# EAGLE board CT_schematic (EAGLE 7.6.0)

Size 100 x 80 mm. Coordinates in mm from the lower left corner, seen from the top.
Outline: 0,0 100,0 100,80 0,80 0,0
Copper layers (1*16): Top 0.035mm / dielectric 1.5mm / Bottom 0.035mm
Design rules "default": minimum track width 10mil, minimum drill 24mil, track to track 8mil, track to pad 8mil, pad to pad 8mil, via to via 8mil, smd to smd 8mil, copper to edge 40mil, drill to drill 8mil, minimum pad ring 10mil, minimum via ring 8mil, stop-mask expansion 4mil, vias tented up to drill 0mil, thermal gap 10mil

## Footprints (pad centres in the part's own frame; a part is rotated, then mirrored left to right if it is on the bottom)
C0603 = smd 0.8 x 0.8: 1 -0.762,0; 2 0.762,0
C0402 = smd 0.5 x 0.5: 1 -0.508,0; 2 0.508,0
C1210 = smd 1.2 x 2.5: 1 -1.524,0; 2 1.524,0
C0805 = smd 1.2 x 1.3: 1 -1.016,0; 2 1.016,0
2220 = smd 1.85 x 5.5: 1 -2.55,0; 2 2.55,0
EXV-9H = smd 3.505 x 1.676: 1 -2.857,0; 2 2.857,0
L0603 = smd 0.8 x 0.8: 1 -0.762,0; 2 0.762,0
DR1040 = smd 1.6 x 3.2: 1 -4.458,0; 2 4.458,0
PJ-037B_PACKAGE = drill 3.7 square: 1 12,0 | drill 3.2 square: 2 6,0
R0603 = smd 0.8 x 0.8: 1 -0.762,0; 2 0.762,0
UFQFPN48 = smd 0.559 x 0.305: 1 -3.375,2.751; 2 -3.375,2.251; 3 -3.375,1.75; 4 -3.375,1.25; 5 -3.375,0.75; 6 -3.375,0.25; 7 -3.375,-0.25; 8 -3.375,-0.75; 9 -3.375,-1.25; 10 -3.375,-1.75; 11 -3.375,-2.251; 12 -3.375,-2.751; 25 3.375,-2.751; 26 3.375,-2.251; 27 3.375,-1.75; 28 3.375,-1.25; 29 3.375,-0.75; 30 3.375,-0.25; 31 3.375,0.25; 32 3.375,0.75; 33 3.375,1.25; 34 3.375,1.75; 35 3.375,2.251; 36 3.375,2.751 | smd 0.305 x 0.559: 13 -2.751,-3.375; 14 -2.251,-3.375; 15 -1.75,-3.375; 16 -1.25,-3.375; 17 -0.75,-3.375; 18 -0.25,-3.375; 19 0.25,-3.375; 20 0.75,-3.375; 21 1.25,-3.375; 22 1.75,-3.375; 23 2.251,-3.375; 24 2.751,-3.375; 37 2.751,3.375; 38 2.251,3.375; 39 1.75,3.375; 40 1.25,3.375; 41 0.75,3.375; 42 0.25,3.375; 43 -0.25,3.375; 44 -0.75,3.375; 45 -1.25,3.375; 46 -1.75,3.375; 47 -2.251,3.375; 48 -2.751,3.375 | smd 5.588 x 5.588: 49 0,0
LGA63S127P16X13_2050X1750X150 = smd 0.9 x 0.9: 1 -9.525,-8.05; 2 -8.255,-8.05; 3 -6.985,-8.05; 4 -5.715,-8.05; 5 -4.445,-8.05; 6 -3.175,-8.05; 7 -1.905,-8.05; 8 -0.635,-8.05; 9 0.635,-8.05; 10 1.905,-8.05; 11 3.175,-8.05; 12 4.445,-8.05; 13 5.715,-8.05; 14 6.985,-8.05; 15 8.255,-8.05; 16 9.525,-8.05; 17 9.525,-6.35; 18 9.525,-5.08; 19 9.525,-3.81; 20 9.525,-2.54; 21 9.525,-1.27; 22 9.525,0; 23 9.525,1.27; 24 9.525,2.54; 25 9.525,3.81; 26 9.525,5.08; 27 9.525,6.35; 28 9.525,8.05; 29 8.255,8.05; 30 6.985,8.05; 31 5.715,8.05; 32 4.445,8.05; 33 3.175,8.05; 34 1.905,8.05; 35 0.635,8.05; 36 -0.635,8.05; 37 -1.905,8.05; 38 -3.175,8.05; 39 -4.445,8.05; 40 -5.715,8.05; 41 -6.985,8.05; 42 -8.255,8.05; 43 -9.525,8.05; 44 -9.525,6.35; 45 -9.525,5.08; 46 -9.525,3.81; 47 -9.525,2.54; 48 -9.525,1.27; 49 -9.525,0; 50 -9.525,-1.27; 51 -9.525,-2.54; 52 -9.525,-3.81; 53 -9.525,-5.08; 54 -9.525,-6.35 | smd 2.2 x 2.2: 55 -4.5,-4.5; 56 -1.5,-4.5; 57 1.5,-4.5; 58 -4.5,-1.5; 59 -1.5,-1.5; 60 1.5,-1.5; 61 -4.5,1.5; 62 -1.5,1.5; 63 1.5,1.5
COAXIAL_C = smd 1 x 1: 1 0,-1.5; 2 0,1.5 | smd 1.05 x 2.2: 3 -1.475,0; 4 1.475,0
SSOP-28 = smd 1.5 x 0.4: 1 -3.625,4.225; 2 -3.625,3.575; 3 -3.625,2.925; 4 -3.625,2.275; 5 -3.625,1.625; 6 -3.625,0.975; 7 -3.625,0.325; 8 -3.625,-0.325; 9 -3.625,-0.975; 10 -3.625,-1.625; 11 -3.625,-2.275; 12 -3.625,-2.925; 13 -3.625,-3.575; 14 -3.625,-4.225; 15 3.625,-4.225; 16 3.625,-3.575; 17 3.625,-2.925; 18 3.625,-2.275; 19 3.625,-1.625; 20 3.625,-0.975; 21 3.625,-0.325; 22 3.625,0.325; 23 3.625,0.975; 24 3.625,1.625; 25 3.625,2.275; 26 3.625,2.925; 27 3.625,3.575; 28 3.625,4.225
FCI_10118193-0001LF = smd 0.4 x 1.35: 1 -1.3,2.675; 2 -0.65,2.675; 3 0,2.675; 4 0.65,2.675; 5 1.3,2.675 | smd 1.6 x 1.4: 6 -3.2,2.45; 7 3.2,2.45 | smd 1.9 x 1.9: 8 -1.2,0; 9 1.2,0 | hole 0.5: -3.3,0; 3.3,0
ABS07-32.768KHZ-7-T = smd 1.1 x 2.4: 1 -2.5,0; 2 0,0
ABLS-25.000MHZ-B2F-T = smd 5.6 x 2.8: 1 -3.81,0; 2 5.69,0
ASFL1 = smd 1.7 x 1.5: 1 -1.27,-1.1; 2 1.27,-1.1; 3 1.27,1.1; 4 -1.27,1.1
QFN-16_EP = smd 0.805 x 0.3: 1 -1.452,0.75; 2 -1.452,0.25; 3 -1.452,-0.25; 4 -1.452,-0.75; 9 1.452,-0.75; 10 1.452,-0.25; 11 1.452,0.25; 12 1.452,0.75 | smd 0.3 x 0.805: 5 -0.75,-1.452; 6 -0.25,-1.452; 7 0.25,-1.452; 8 0.75,-1.452; 13 0.75,1.452; 14 0.25,1.452; 15 -0.25,1.452; 16 -0.75,1.452 | smd 1.55 x 1.55: 17 0,0
SON-6 = smd 0.55 x 0.3: 1 -0.355,0.5 | smd 0.52 x 0.3: 2 -0.37,0; 3 -0.37,-0.5; 4 0.37,-0.5; 5 0.37,0; 6 0.37,0.5
SW_4-1437565-2 = smd 1.4 x 2.1: 1 -2.23,4.55; 2 -2.23,-4.55; 3 2.23,4.55; 4 2.23,-4.55
LGM67K-G1J2-24-Z = smd 0.8 x 1.4: A -2,0; C 0,0
NC7SZ125M5X = smd 1.3 x 0.7: 1 -1.3,0.95; 2 -1.3,0; 3 -1.3,-0.95; 4 1.3,-0.95; 5 1.3,0.95
DUMMY_PACKAGE_144 = drill 0.3: 1 0,-1; 2 1.5,-1; 3 3,-1

## Placement (x,y rotation side)
C1  1e-07  [C0603]  -63.5,62.23 0 top  (outside the outline)
C2  1e-07  [C0603]  -67.31,62.23 0 top  (outside the outline)
C3  1e-07  [C0603]  -15.24,67.31 0 top  (outside the outline)
C4  1e-07  [C0603]  -19.05,67.31 0 top  (outside the outline)
C5  4.7e-06  [C0603]  -59.69,62.23 0 top  (outside the outline)
C6  1e-07  [C0603]  -22.86,67.31 0 top  (outside the outline)
C7  1e-08  [C0603]  -26.67,67.31 0 top  (outside the outline)
C8  1e-06  [C0603]  -30.48,67.31 0 top  (outside the outline)
C9  1e-11  [C0402]  -30.48,72.39 0 top  (outside the outline)
C10  1e-11  [C0402]  -34.29,72.39 0 top  (outside the outline)
C11  1e-11  [C0402]  -38.1,72.39 0 top  (outside the outline)
C12  1e-11  [C0402]  -41.91,72.39 0 top  (outside the outline)
C13  1e-12  [C0402]  -45.72,72.39 0 top  (outside the outline)
C14  2.2e-05  [C1210]  -29.21,55.88 0 top  (outside the outline)
C15  1e-07  [C0402]  -49.53,72.39 0 top  (outside the outline)
C16  1e-07  [C0402]  -53.34,72.39 0 top  (outside the outline)
C17  1e-07  [C0402]  -57.15,72.39 0 top  (outside the outline)
C18  4.7e-06  [C0805]  -46.99,54.61 0 top  (outside the outline)
C19  1e-07  [C0402]  -60.96,72.39 0 top  (outside the outline)
C20  1e-07  [C0402]  -64.77,72.39 0 top  (outside the outline)
C21  1e-08  [C0402]  -68.58,72.39 0 top  (outside the outline)
C22  1e-05  [C0805]  -52.07,54.61 0 top  (outside the outline)
C23  1e-06  [C0603]  -34.29,67.31 0 top  (outside the outline)
C24  1e-07  [C0402]  -15.24,77.47 0 top  (outside the outline)
C25  6.8e-05  [2220]  -48.26,27.94 0 top  (outside the outline)
C26  1e-07  [C0402]  -19.05,77.47 0 top  (outside the outline)
C27  0.0001  [EXV-9H]  -57.15,39.37 0 top  (outside the outline)
C28  0.0001  [EXV-9H]  -17.78,48.26 0 top  (outside the outline)
C29  1e-08  [C0402]  -22.86,77.47 0 top  (outside the outline)
C30  1e-08  [C0402]  -26.67,77.47 0 top  (outside the outline)
F1  240.0  [L0603]  -38.1,67.31 0 top  (outside the outline)
I1  3.6e-09  [C0402]  -26.67,72.39 0 top  (outside the outline)
I2  5.2e-06  [DR1040]  -38.1,27.94 0 top  (outside the outline)
J1  PJ-037B  [PJ-037B_PACKAGE]  -66.04,7.62 0 top  (outside the outline)
R1  10000.0  [R0603]  -20.32,62.23 0 top  (outside the outline)
R2  1000.0  [R0603]  -41.91,67.31 0 top  (outside the outline)
R3  1600.5  [R0603]  -45.72,67.31 0 top  (outside the outline)
R4  4700.0  [R0603]  -49.53,67.31 0 top  (outside the outline)
R5  4700.0  [R0603]  -53.34,67.31 0 top  (outside the outline)
R6  2200.0  [R0603]  -57.15,67.31 0 top  (outside the outline)
R7  2200.0  [R0603]  -60.96,67.31 0 top  (outside the outline)
R8  10000.0  [R0603]  -25.4,62.23 0 top  (outside the outline)
R9  100000.0  [R0603]  -57.15,54.61 0 top  (outside the outline)
R10  2700.0  [R0603]  -64.77,67.31 0 top  (outside the outline)
R11  4700.0  [R0603]  -68.58,67.31 0 top  (outside the outline)
R12  10000.0  [R0603]  -30.48,62.23 0 top  (outside the outline)
R13  10000.0  [R0603]  -35.56,62.23 0 top  (outside the outline)
R14  20000.0  [R0603]  -40.64,62.23 0 top  (outside the outline)
R15  91000.0  [R0603]  -45.72,62.23 0 top  (outside the outline)
R16  300000.0  [R0603]  -62.23,54.61 0 top  (outside the outline)
R17  10000.0  [R0603]  -50.8,62.23 0 top  (outside the outline)
R18  10000.0  [R0603]  -55.88,62.23 0 top  (outside the outline)
R19  9100.0  [R0603]  -15.24,72.39 0 top  (outside the outline)
R20  680000.0  [R0603]  -67.31,54.61 0 top  (outside the outline)
R21  120000.0  [R0603]  -15.24,62.23 0 top  (outside the outline)
U1  STM32L152C8U6  [UFQFPN48]  -57.15,26.67 0 top  (outside the outline)
U2  CC3200MODR1M2AMOBT  [LGA63S127P16X13_2050X1750X150]  -25.4,11.43 0 top  (outside the outline)
U3  73412-0114  [COAXIAL_C]  -49.53,39.37 0 top  (outside the outline)
U4  FT232RL-REEL  [SSOP-28]  -45.72,7.62 0 top  (outside the outline)
U5  10118193-0001LF  [FCI_10118193-0001LF]  -35.56,39.37 0 top  (outside the outline)
U6  ABS07-32.768KHZ-7-T  [ABS07-32.768KHZ-7-T]  -59.69,48.26 0 top  (outside the outline)
U7  ABLS-25.000MHZ-B2F-T  [ABLS-25.000MHZ-B2F-T]  -36.83,48.26 0 top  (outside the outline)
U8  ASFL1-12MHZ-NCS  [ASFL1]  -26.67,39.37 0 top  (outside the outline)
U9  LTC3601EUD#PBF  [QFN-16_EP]  -20.32,72.39 0 top  (outside the outline)
U10  TPS3895ADRYR  [SON-6]  -35.56,76.2 0 top  (outside the outline)
U11  4-1437565-2  [SW_4-1437565-2]  -27.94,29.21 0 top  (outside the outline)
U12  Q65110A2395  [LGM67K-G1J2-24-Z]  -17.78,55.88 0 top  (outside the outline)
U13  nc7sz125m5x  [NC7SZ125M5X]  -34.29,54.61 0 top  (outside the outline)
U14  nc7sz125m5x  [NC7SZ125M5X]  -40.64,54.61 0 top  (outside the outline)
U15  Dummy  [DUMMY_PACKAGE_144]  -33.02,77.47 0 top  (outside the outline)

## Library data of the parts
C1-C30 F1 I1 I2 J1 R1-R21 U1-U15 = circuit_tree

## Nets
CLK_CRYSTAL_U1_3: C9.1 U1.3 U6.1
CLK_CRYSTAL_U1_4: C10.1 U1.4 U6.2
CLK_CRYSTAL_U1_5: C11.1 U1.5 U7.1
CLK_CRYSTAL_U1_6: C12.1 U1.6 U7.2
CLK_U4_27: U4.27 U8.3
GND: C1.2 C2.2 C3.2 C4.2 C5.2 C6.2 C7.2 C8.2 C9.2 C10.2 C11.2 C12.2 C13.2 C14.2 C15.2 C16.2 C17.2 C18.2 C19.2 C20.2 C21.2 C22.2 C23.2 C25.1 C25.2 C26.2 C27.2 C28.2 C29.2 C30.2 J1.2 R2.2 R8.2 R9.2 R10.2 R13.2 R14.2 R16.2 R19.2 R21.2 U1.8 U1.23 U1.35 U1.47 U1.49 U2.1 U2.2 U2.16 U2.27 U2.28 U2.30 U2.32 U2.38 U2.43 U2.55 U2.56 U2.57 U2.58 U2.59 U2.60 U2.61 U2.62 U2.63 U3.1 U3.2 U3.3 U3.4 U4.7 U4.18 U4.21 U4.25 U4.26 U5.5 U5.6 U5.7 U5.8 U5.9 U8.2 U9.1 U9.9 U9.17 U10.2 U12.C U13.1 U13.3 U14.1 U14.3 U15.1
NET_U1_1: C6.1 U1.1
NET_U1_7: R5.1 U1.7 U14.4
NET_U1_9: C7.1 C8.1 F1.1 U1.9
NET_U1_42: R6.1 U1.42 U2.3
NET_U1_43: R7.1 U1.43 U2.4
NET_U1_44: R8.1 U1.44
NET_U1_45: R3.1 U1.45 U12.A
NET_U1_46: R1.1 U1.46 U11.3 U11.4
NET_U2_21: R9.1 U2.21
NET_U2_23: R10.1 U2.23
NET_U2_35: R4.1 U2.35 U13.4
NET_U3_1: C13.1 I1.1 U3.1
NET_U3_31: I1.2
NET_U4_14: R12.1 U4.14
NET_U4_17: C19.1 U4.17
NET_U4_19: R13.1 U4.19
NET_U5_1: R11.1 U5.1
NET_U5_2: U4.16 U5.2
NET_U5_3: U4.15 U5.3
NET_U5_19: R11.2
NET_U9_3: C24.2 I2.1 U9.3 U9.4
NET_U9_6: C24.1 U9.6
NET_U9_7: C23.1 U9.7 U9.12
NET_U9_10: R16.1 U9.10
NET_U9_11: R14.1 R15.1 U9.11
NET_U9_14: U9.14
NET_U9_ATNET_3: I2.2 R15.2
NET_U10_1: R18.1 R19.1 U10.1
NET_U10_3: R20.2 R21.1 U10.3
NET_U10_4: R17.1 U10.4 U13.2 U14.2
NET_U11_1: R2.1 U11.1 U11.2
PROC_ADC_IN19: U1.26 U15.3
PROC_ADC_IN20: U1.27 U15.2
PROC_USART1_CTS: U1.32 U4.3
PROC_USART1_RTS: U1.33 U4.11
PROC_USART1_RX: U1.31 U4.1
PROC_USART1_TX: U1.30 U4.5
VCC_S1_11V2: C22.1 C27.1 C28.1 J1.1 U9.15 U9.16
VCC_TIER1_3V3: C1.1 C2.1 C3.1 C4.1 C5.1 C14.1 C15.1 C16.1 C17.1 C18.1 C20.1 C21.1 C25.2 C26.1 C29.1 C30.1 F1.2 I2.2 R1.2 R3.2 R4.2 R5.2 R6.2 R7.2 R12.2 R15.2 R17.2 R18.2 R20.1 U1.24 U1.36 U1.48 U2.36 U2.37 U2.40 U4.4 U4.20 U8.4 U9.8 U10.6 U13.5 U14.5

## Tracks (layer width: path | path; a pad name or v marks a point on that pad's centre or on a via)
CLK_CRYSTAL_U1_3  (2 unrouted)
CLK_CRYSTAL_U1_4  (2 unrouted)
CLK_CRYSTAL_U1_5  (2 unrouted)
CLK_CRYSTAL_U1_6  (2 unrouted)
CLK_U4_27  (1 unrouted)
GND  (87 unrouted)
NET_U1_1  (1 unrouted)
NET_U1_7  (2 unrouted)
NET_U1_9  (3 unrouted)
NET_U1_42  (2 unrouted)
NET_U1_43  (2 unrouted)
NET_U1_44  (1 unrouted)
NET_U1_45  (2 unrouted)
NET_U1_46  (3 unrouted)
NET_U2_21  (1 unrouted)
NET_U2_23  (1 unrouted)
NET_U2_35  (2 unrouted)
NET_U3_1  (2 unrouted)
NET_U4_14  (1 unrouted)
NET_U4_17  (1 unrouted)
NET_U4_19  (1 unrouted)
NET_U5_1  (1 unrouted)
NET_U5_2  (1 unrouted)
NET_U5_3  (1 unrouted)
NET_U9_3  (3 unrouted)
NET_U9_6  (1 unrouted)
NET_U9_7  (2 unrouted)
NET_U9_10  (1 unrouted)
NET_U9_11  (2 unrouted)
NET_U9_ATNET_3  (1 unrouted)
NET_U10_1  (2 unrouted)
NET_U10_3  (2 unrouted)
NET_U10_4  (3 unrouted)
NET_U11_1  (2 unrouted)
PROC_ADC_IN19  (1 unrouted)
PROC_ADC_IN20  (1 unrouted)
PROC_USART1_CTS  (1 unrouted)
PROC_USART1_RTS  (1 unrouted)
PROC_USART1_RX  (1 unrouted)
PROC_USART1_TX  (1 unrouted)
VCC_S1_11V2  (5 unrouted)
VCC_TIER1_3V3  (41 unrouted)